# Altium PCB buck.PcbDoc
Units mm, origin at the board's own origin, x right, y up, seen from the top; angles counter-clockwise.
Board outline 50.25 x 42.93 mm, 2 copper layers (Top Layer, Bottom Layer); 22 components, 10 nets, 63 pads, 46 vias.
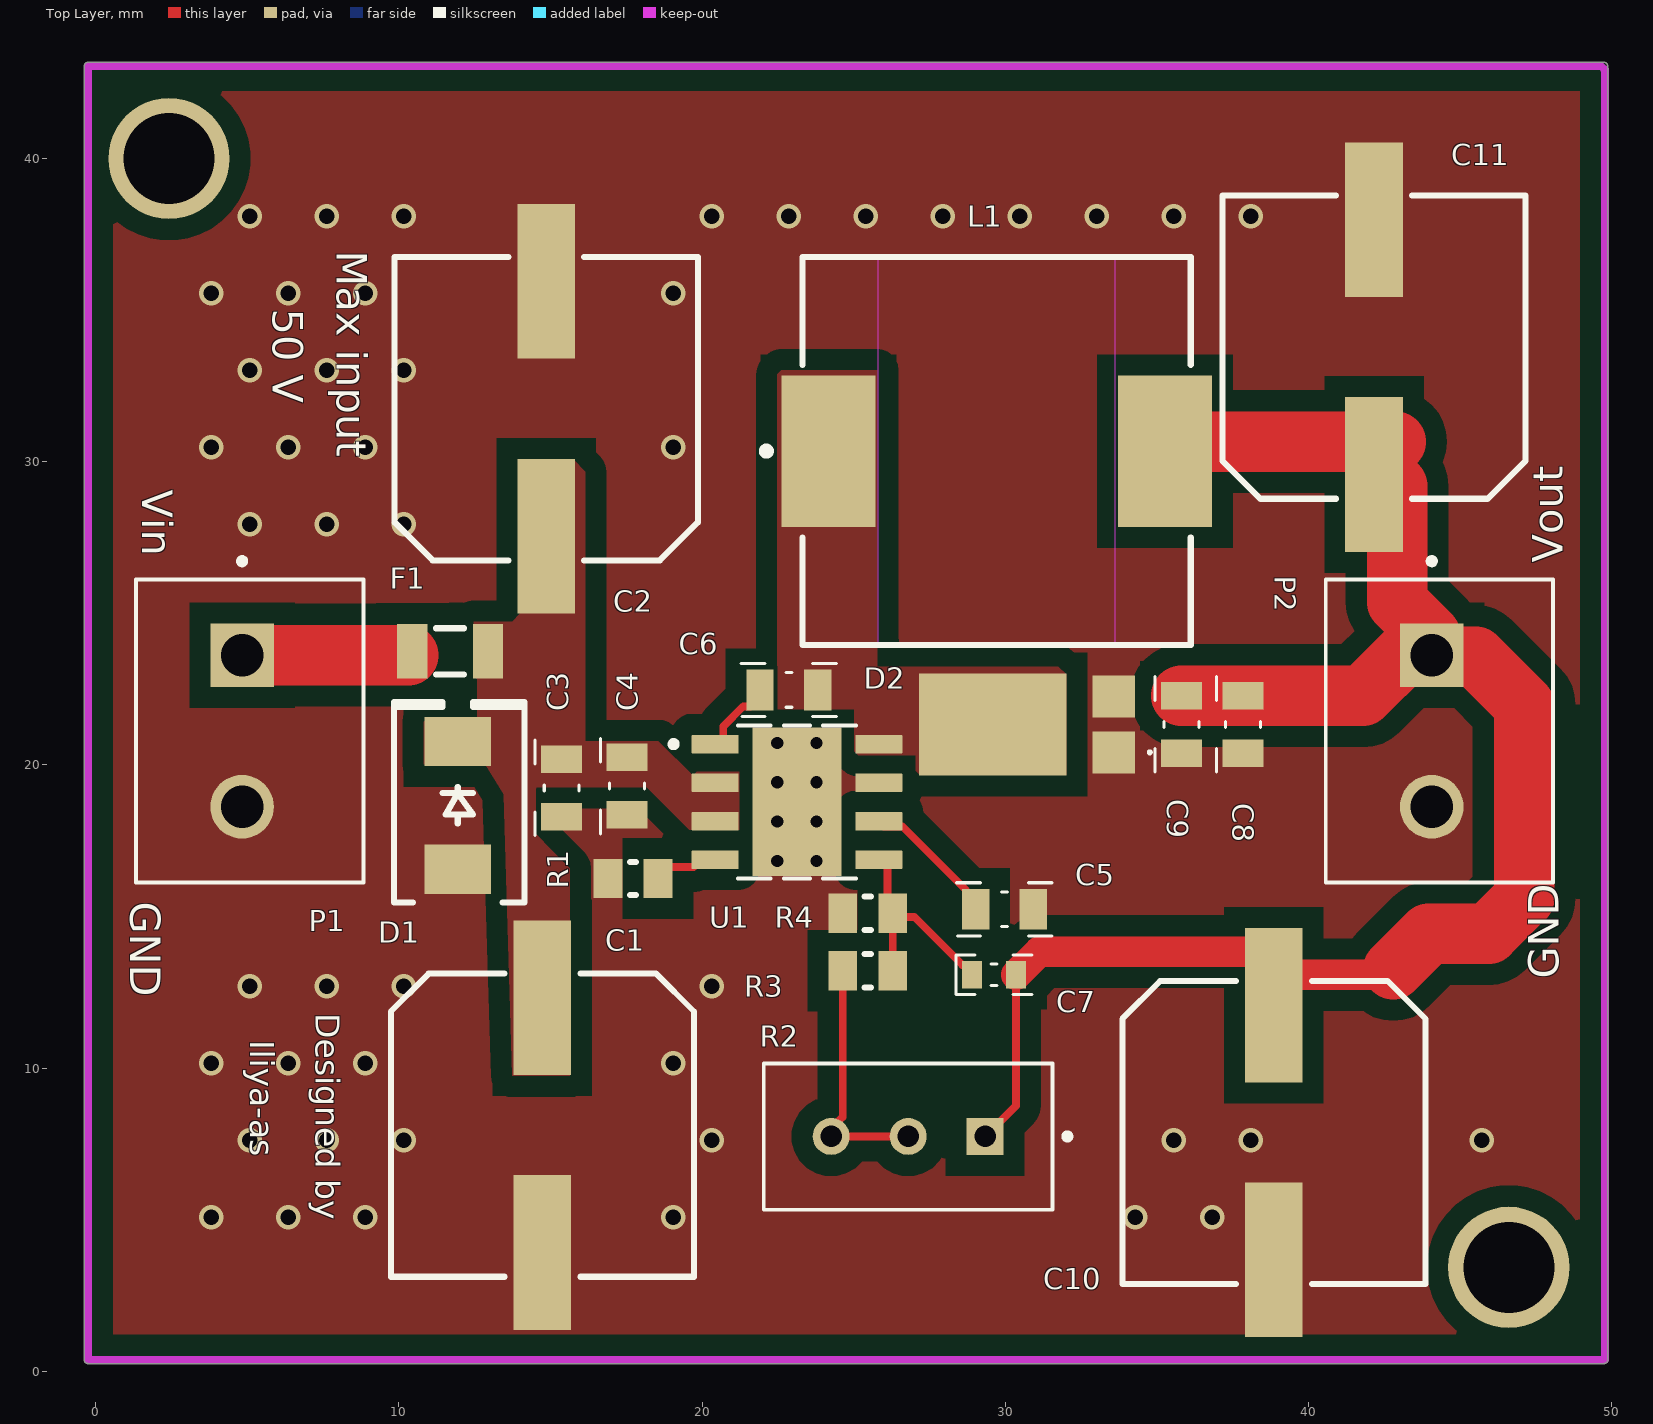
[diagram p0: Top Layer view]
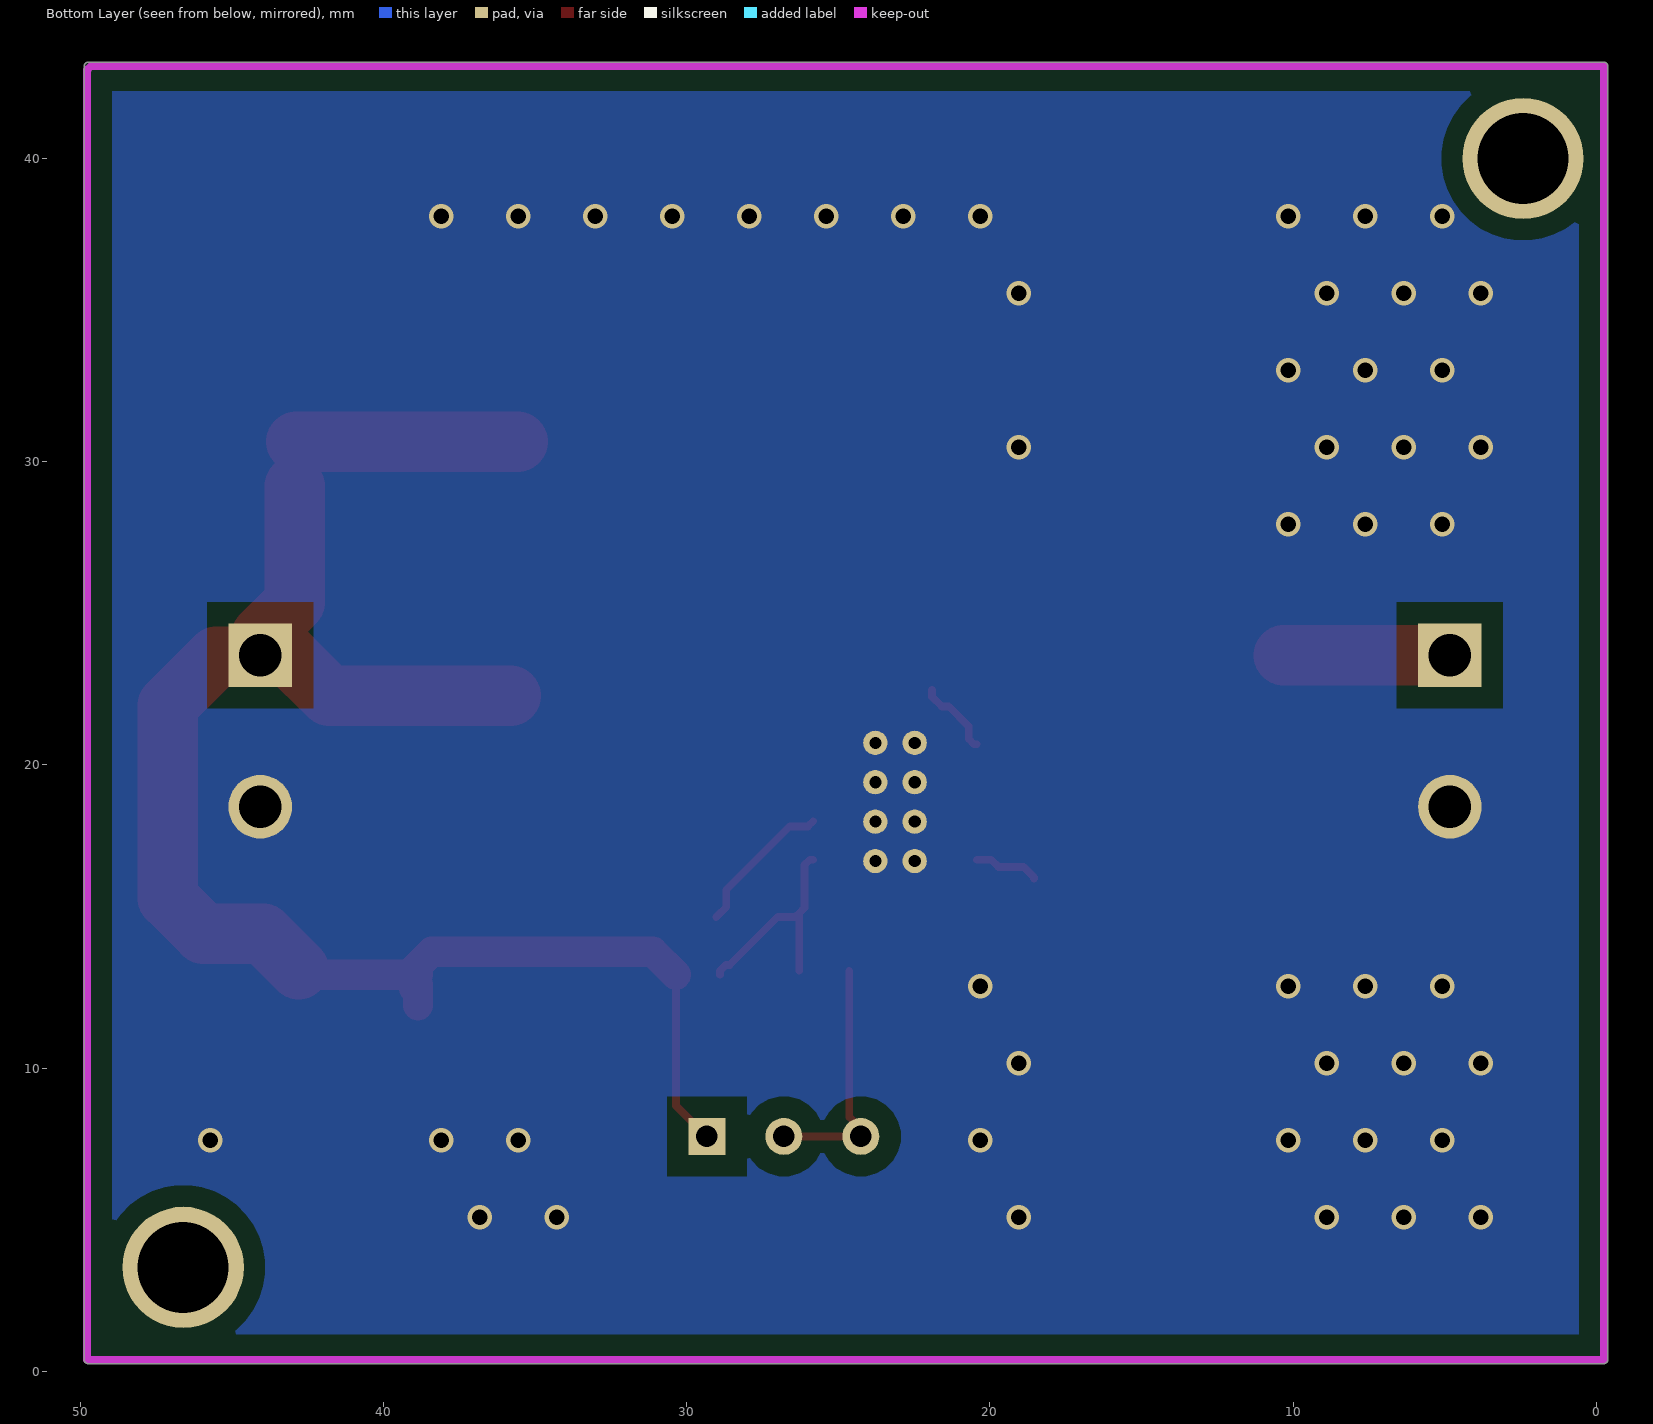
[diagram p1: Bottom Layer view, seen from below]

## Layer stack, top to bottom
Top Solder: solder mask 0.0102, Solder Resist, Dk 3.5
Top Layer: signal copper 0.0356
Dielectric 1: dielectric 0.32, FR-4, Dk 4.8
Bottom Layer: signal copper 0.0356
Bottom Solder: solder mask 0.0102, Solder Resist, Dk 3.5

## Board outline
-0.254,0.254 cw(c-0.254,0.381) -0.381,0.381 -0.381,43.053 cw(c-0.254,43.053) -0.254,43.18 49.746,43.18 cw(c49.746,43.053) 49.873,43.053 49.873,0.381 cw(c49.746,0.381) 49.746,0.254

## Design rules (kind name [scope] priority, off if disabled: settings)
BoardOutlineClearance [All] p1: gap=0.254 ignorepadtopadclearanceinfootprint=FALSE
Clearance "polygon global" [InNamedPolygon('GND_L01_P014') or      InNamedPolygon('GND_L02_P013')] p1: gap=0.7 ignorepadtopadclearanceinfootprint=FALSE
Clearance [All] p2: gap=0.127 ignorepadtopadclearanceinfootprint=TRUE
ComponentClearance [All] p1: gap=0 collisioncheckmode=3 verticalgap=0 showdistances=FALSE
HoleSize [All] p1: absolutevalues=TRUE maxlimit=3.5 minlimit=0.305 maxpercent=80.000 minpercent=20.000
HoleToHoleClearance [All] p1: gap=0.305 allowstackedmicrovias=TRUE
MinimumAnnularRing [All] p1: minimumring=0.105
PolygonConnect PolygonConnect_32 [All vs IsNamedPolygon('GND_L02_P013')] p1: connectstyle=Direct reliefconductorwidth=0.254 reliefentries=4 polygonreliefangle="90 Angle" airgapwidth=0.254
PolygonConnect PolygonConnect_31 [All vs IsNamedPolygon('SW_L01_P000')] p2: thpad.connectstyle=Direct thpad.reliefconductorwidth=0.254 thpad.reliefentries=4 thpad.polygonreliefangle="90 Angle" thpad.airgapwidth=0.254 smdpad.connectstyle=Direct smdpad.reliefconductorwidth=0.254 smdpad.reliefentries=4 smdpad.polygonreliefangle="90 Angle" smdpad.airgapwidth=0.254 via.connectstyle=Relief via.reliefconductorwidth=0.254 via.reliefentries=4 via.polygonreliefangle="90 Angle" via.airgapwidth=0.254
PolygonConnect PolygonConnect_30 [All vs IsNamedPolygon('GND_L01_P014')] p3: connectstyle=Direct reliefconductorwidth=0.254 reliefentries=4 polygonreliefangle="90 Angle" airgapwidth=0.254
PolygonConnect PolygonConnect_29 [All vs IsNamedPolygon('DC-IN_L01_P008')] p4: thpad.connectstyle=Direct thpad.reliefconductorwidth=0.254 thpad.reliefentries=4 thpad.polygonreliefangle="90 Angle" thpad.airgapwidth=0.254 smdpad.connectstyle=Direct smdpad.reliefconductorwidth=0.254 smdpad.reliefentries=4 smdpad.polygonreliefangle="90 Angle" smdpad.airgapwidth=0.254 via.connectstyle=Relief via.reliefconductorwidth=0.254 via.reliefentries=4 via.polygonreliefangle="90 Angle" via.airgapwidth=0.254
PolygonConnect PolygonConnect_28 [All vs IsNamedPolygon('DC-IN_L01_P004')] p5: connectstyle=Direct reliefconductorwidth=0.254 reliefentries=4 polygonreliefangle="90 Angle" airgapwidth=0.254
PolygonConnect PolygonConnect_27 [All vs IsNamedPolygon('GND_L02_P011')] p6: connectstyle=Direct reliefconductorwidth=0.254 reliefentries=4 polygonreliefangle="90 Angle" airgapwidth=0.254
PolygonConnect PolygonConnect_26 [All vs IsNamedPolygon('SW_L01_P000')] p7: connectstyle=Direct reliefconductorwidth=0.254 reliefentries=4 polygonreliefangle="90 Angle" airgapwidth=0.254
PolygonConnect PolygonConnect_25 [All vs IsNamedPolygon('GND_L01_P012')] p8: thpad.connectstyle=Direct thpad.reliefconductorwidth=0.254 thpad.reliefentries=4 thpad.polygonreliefangle="90 Angle" thpad.airgapwidth=0.254 smdpad.connectstyle=Direct smdpad.reliefconductorwidth=0.254 smdpad.reliefentries=4 smdpad.polygonreliefangle="90 Angle" smdpad.airgapwidth=0.254 via.connectstyle=Relief via.reliefconductorwidth=0.254 via.reliefentries=4 via.polygonreliefangle="90 Angle" via.airgapwidth=0.254
PolygonConnect PolygonConnect_24 [All vs IsNamedPolygon('DC-IN_L01_P008')] p9: thpad.connectstyle=Direct thpad.reliefconductorwidth=0.254 thpad.reliefentries=4 thpad.polygonreliefangle="90 Angle" thpad.airgapwidth=0.254 smdpad.connectstyle=Direct smdpad.reliefconductorwidth=0.254 smdpad.reliefentries=4 smdpad.polygonreliefangle="90 Angle" smdpad.airgapwidth=0.254 via.connectstyle=Relief via.reliefconductorwidth=0.254 via.reliefentries=4 via.polygonreliefangle="90 Angle" via.airgapwidth=0.254
PolygonConnect PolygonConnect_23 [All vs IsNamedPolygon('DC-IN_L01_P004')] p10: thpad.connectstyle=Direct thpad.reliefconductorwidth=0.254 thpad.reliefentries=4 thpad.polygonreliefangle="90 Angle" thpad.airgapwidth=0.254 smdpad.connectstyle=Direct smdpad.reliefconductorwidth=0.254 smdpad.reliefentries=4 smdpad.polygonreliefangle="90 Angle" smdpad.airgapwidth=0.254 via.connectstyle=Relief via.reliefconductorwidth=0.254 via.reliefentries=4 via.polygonreliefangle="90 Angle" via.airgapwidth=0.254
PolygonConnect PolygonConnect_22 [All vs IsNamedPolygon('GND_L01_P010')] p11: thpad.connectstyle=Direct thpad.reliefconductorwidth=0.254 thpad.reliefentries=4 thpad.polygonreliefangle="90 Angle" thpad.airgapwidth=0.254 smdpad.connectstyle=Direct smdpad.reliefconductorwidth=0.254 smdpad.reliefentries=4 smdpad.polygonreliefangle="90 Angle" smdpad.airgapwidth=0.254 via.connectstyle=Relief via.reliefconductorwidth=0.254 via.reliefentries=4 via.polygonreliefangle="90 Angle" via.airgapwidth=0.254
PolygonConnect PolygonConnect_21 [All vs IsNamedPolygon('GND_L02_P009')] p12: connectstyle=Direct reliefconductorwidth=0.254 reliefentries=4 polygonreliefangle="90 Angle" airgapwidth=0.254
PolygonConnect PolygonConnect_20 [All vs IsNamedPolygon('GND_L02_P009')] p13: thpad.connectstyle=Direct thpad.reliefconductorwidth=0.254 thpad.reliefentries=4 thpad.polygonreliefangle="90 Angle" thpad.airgapwidth=0.254 smdpad.connectstyle=Direct smdpad.reliefconductorwidth=0.254 smdpad.reliefentries=4 smdpad.polygonreliefangle="90 Angle" smdpad.airgapwidth=0.254 via.connectstyle=Relief via.reliefconductorwidth=0.254 via.reliefentries=4 via.polygonreliefangle="90 Angle" via.airgapwidth=0.254
PolygonConnect PolygonConnect_19 [All vs IsNamedPolygon('GND_L02_P009')] p14: connectstyle=Direct reliefconductorwidth=0.254 reliefentries=4 polygonreliefangle="90 Angle" airgapwidth=0.254
PolygonConnect PolygonConnect_18 [All vs IsNamedPolygon('GND_L02_P009')] p15: connectstyle=Direct reliefconductorwidth=0.254 reliefentries=4 polygonreliefangle="90 Angle" airgapwidth=0.254
PolygonConnect PolygonConnect_17 [All vs IsNamedPolygon('DC-IN_L01_P008')] p16: connectstyle=Direct reliefconductorwidth=0.254 reliefentries=4 polygonreliefangle="90 Angle" airgapwidth=0.254
PolygonConnect PolygonConnect_16 [All vs IsNamedPolygon('GND_L02_P006')] p17: connectstyle=Direct reliefconductorwidth=0.254 reliefentries=4 polygonreliefangle="90 Angle" airgapwidth=0.254
PolygonConnect PolygonConnect_15 [All vs IsNamedPolygon('GND_L01_P005')] p18: connectstyle=Direct reliefconductorwidth=0.254 reliefentries=4 polygonreliefangle="90 Angle" airgapwidth=0.254
PolygonConnect PolygonConnect_14 [All vs IsNamedPolygon('DC-IN_L01_P004')] p19: connectstyle=Direct reliefconductorwidth=0.254 reliefentries=4 polygonreliefangle="90 Angle" airgapwidth=0.254
PolygonConnect PolygonConnect_13 [All vs IsNamedPolygon('DC-IN_L01_P002')] p20: connectstyle=Direct reliefconductorwidth=0.254 reliefentries=4 polygonreliefangle="90 Angle" airgapwidth=0.254
PolygonConnect PolygonConnect_12 [All vs IsNamedPolygon('SW_L01_P000')] p21: connectstyle=Direct reliefconductorwidth=0.254 reliefentries=4 polygonreliefangle="90 Angle" airgapwidth=0.254
PolygonConnect PolygonConnect_11 [All vs IsNamedPolygon('SW_L01_P000')] p22: connectstyle=Direct reliefconductorwidth=0.254 reliefentries=4 polygonreliefangle="90 Angle" airgapwidth=0.254
PolygonConnect PolygonConnect_10 [All vs IsNamedPolygon('SW_L01_P000')] p23: connectstyle=Direct reliefconductorwidth=0.254 reliefentries=4 polygonreliefangle="90 Angle" airgapwidth=0.254
PolygonConnect PolygonConnect_9 [All vs IsNamedPolygon('SW_L01_P002')] p24: connectstyle=Direct reliefconductorwidth=0.254 reliefentries=4 polygonreliefangle="90 Angle" airgapwidth=0.254
PolygonConnect PolygonConnect_8 [All vs IsNamedPolygon('SW_L01_P000')] p25: connectstyle=Direct reliefconductorwidth=0.254 reliefentries=4 polygonreliefangle="90 Angle" airgapwidth=0.254
PolygonConnect PolygonConnect_7 [All vs IsNamedPolygon('GND_L01_P000')] p26: connectstyle=Direct reliefconductorwidth=0.254 reliefentries=4 polygonreliefangle="90 Angle" airgapwidth=0.254
PolygonConnect PolygonConnect_6 [All vs IsNamedPolygon('GND_L02_P008')] p27: connectstyle=Direct reliefconductorwidth=0.254 reliefentries=4 polygonreliefangle="90 Angle" airgapwidth=0.254
PolygonConnect PolygonConnect_5 [All vs IsNamedPolygon('SW_L01_P005')] p28: thpad.connectstyle=Direct thpad.reliefconductorwidth=0.254 thpad.reliefentries=4 thpad.polygonreliefangle="90 Angle" thpad.airgapwidth=0.254 smdpad.connectstyle=Direct smdpad.reliefconductorwidth=0.254 smdpad.reliefentries=4 smdpad.polygonreliefangle="90 Angle" smdpad.airgapwidth=0.254 via.connectstyle=Relief via.reliefconductorwidth=0.254 via.reliefentries=4 via.polygonreliefangle="90 Angle" via.airgapwidth=0.254
PolygonConnect PolygonConnect_4 [All vs IsNamedPolygon('GND_L01_P009')] p29: connectstyle=Direct reliefconductorwidth=0.254 reliefentries=4 polygonreliefangle="90 Angle" airgapwidth=0.254
PolygonConnect PolygonConnect_3 [All vs IsNamedPolygon('DC-IN_L01_P004')] p30: connectstyle=Direct reliefconductorwidth=0.254 reliefentries=4 polygonreliefangle="90 Angle" airgapwidth=0.254
PolygonConnect PolygonConnect_2 [All vs IsNamedPolygon('GND_L02_P000')] p31: connectstyle=Direct reliefconductorwidth=0.254 reliefentries=4 polygonreliefangle="90 Angle" airgapwidth=0.254
PolygonConnect PolygonConnect_1 [All vs IsNamedPolygon('GND_L01_P001')] p32: connectstyle=Direct reliefconductorwidth=0.254 reliefentries=4 polygonreliefangle="90 Angle" airgapwidth=0.254
PolygonConnect "vias Direct" [IsVia and InNet('GND')] p33: connectstyle=Direct reliefconductorwidth=0.254 reliefentries=4 polygonreliefangle="90 Angle" airgapwidth=0.254
PolygonConnect [All] p34: thpad.connectstyle=Relief thpad.reliefconductorwidth=0.356 thpad.reliefentries=4 thpad.polygonreliefangle="45 Angle" thpad.airgapwidth=0.254 smdpad.connectstyle=Relief smdpad.reliefconductorwidth=0.356 smdpad.reliefentries=4 smdpad.polygonreliefangle="45 Angle" smdpad.airgapwidth=0.254 via.connectstyle=Direct via.reliefconductorwidth=0.356 via.reliefentries=4 via.polygonreliefangle="45 Angle" via.airgapwidth=0.254
RoutingVias [All] p1: holewidth=0.508 width=0.508 viastyle="Through Hole" minholewidth=0.508 minwidth=0.508 maxholewidth=0.508 maxwidth=0.8
SilkToSilkClearance [All] p1: silktosilkclearance=0.203
SilkToSolderMaskClearance [IsPad] p1: minsilkscreentomaskgap=0.15 clearancetoexposedcopper=TRUE
SolderMaskExpansion Viastended [IsVia] p1: expansion=0.102 istentingtop=FALSE
SolderMaskExpansion [All] p2: expansion=0.09 istentingtop=FALSE
SupplyNets "Schematic Supply Nets_3" [InNet('Input')] p1: voltage=0.000
SupplyNets "Schematic Supply Nets_2" [InNet('OUT')] p2: voltage=0.000
SupplyNets "Schematic Supply Nets_1" [InNet('DC-IN')] p3: voltage=0.000
SupplyNets "Schematic Supply Nets_4" [InNet('GND')] p4: voltage=0.000
Width [All] p1: maxlimit=100 minlimit=0.127 preferedwidth=0.254
25 further rules are at their usual default settings.

## Components (designator, comment, footprint, x,y, rotation, side; value= is the part's Value field where it differs from the comment)
C1 "100uF" CAPACITOR-10mm 14.732,8.119 r270 top
C2 "100uF" CAPACITOR-10mm 14.859,31.75 r90 top
C3 "2.2uF" CAPACITOR-0805 15.367,19.243 r90 top
C4 "2.2uF" CAPACITOR-0805 17.526,19.304 r90 top
C5 "100nF" CAPACITOR-0805 29.972,15.24 r0 top
C6 "100nF" CAPACITOR-0805 22.86,22.479 r0 top
C7 "470pF" CAPACITOR-0603 29.628,13.081 r0 top
C8 "2.2uF" CAPACITOR-0805 37.846,21.336 r90 top
C9 "2.2uF" CAPACITOR-0805 35.814,21.336 r90 top
C10 "47uF" CAPACITOR-10mm 38.862,7.874 r270 top
C11 "47uF" CAPACITOR-10mm 42.164,33.782 r90 top
D1 "TVS Diode" "SMB DIODE" 11.938,18.669 r90 top
D2 "PDS5100Q-13D" PDS5100Q13D 30.717,21.336 r180 top
F1 "3A" FUSE-1206 11.684,23.749 r0 top
L1 "22uH" "Power Inductor" 29.718,30.353 r0 top
P1 "DC-Input" "2 Pin Terminal Block 5mm Pitch" 4.826,21.122 r270 top
P2 "Output" "2 Pin Terminal Block 5mm Pitch" 44.069,21.122 r270 top
R1 "47K" Resistor-0805 420.668,-103.765 r0 top
R2 "500K" "Multi turn" 26.797,7.747 r180 top
R3 "100K" Resistor-0805 -377.487,133.229 r180 top
R4 "10K" Resistor-0805 428.415,-104.908 r0 top
U1 "LMR16030" LMR16030 23.129,18.781 r0 top

## Footprints (in the part's own frame and the unit in brackets; to place one, negate y for a bottom-side part, rotate by r counter-clockwise, add the part's x,y. Pads: shape width x height; smd on the part's side, far side on the other; paste and mask are expansions set on the pad)
"2 Pin Terminal Block 5mm Pitch" [mm]
  rect 2.1x2.1 / inner round 2.1 / far side rect 2.1x2.1 hole 1.4: 1(-2.5,0)
  round 2.1 hole 1.4: 2(2.5,0)
  silkscreen extent -5.7,-3.5 5,4, body extent -5.6,-3.75 5,3.75, height 10
CAPACITOR-10mm [mm] "Aluminum SMT Polymer Capacitor, 10.0mm Diameter, 10.80mm Height, 11.00mm Maximum Leads Span"
  rect 5.1x1.9 smd: 1(-4.2,0) 2(4.2,0)
  silkscreen extent -5,-5 5,5, body extent -5.5,-5 5.5,5, height 10.8
CAPACITOR-0603 [mm]
  rect 0.65x0.9 smd: 1(-0.725,0) 2(0.725,0)
  silkscreen extent -1.25,-0.65 1.25,0.65, body extent -0.82,-0.43 0.82,0.43, height 0.4
CAPACITOR-0805 [mm]
  rect 0.9x1.35 smd: 1(-0.95,0) 2(0.95,0)
  silkscreen extent -1.58,-0.58 1.58,0.87, body extent -1.02,-0.65 1.02,0.65, height 0.5
FUSE-1206 [mm]
  rect 1x1.8 smd: 1(-1.25,0) 2(1.25,0)
  silkscreen extent -0.46,-0.76 0.46,0.76, body extent -1.59,-0.76 1.59,0.76, height 0.66
LMR16030 [mm]
  rrect5% 1.55x0.6 smd mask+0: 1(-2.7,1.905) 2(-2.7,0.635) 3(-2.7,-0.635) 4(-2.7,-1.905) 5(2.7,-1.905) 6(2.7,-0.635) 7(2.7,0.635) 8(2.7,1.905)
  rect 2.95x4.9 smd paste-3 mask+0: 9(0,0)
  round 0.8 hole 0.4: 10(-0.65,1.95) 11(0.65,1.95) 12(-0.65,0.65) 13(0.65,0.65) 14(-0.65,-0.65) 15(0.65,-0.65) 16(-0.65,-1.95) 17(0.65,-1.95)
  silkscreen extent -4.17,-2.52 1.95,2.52, body extent -3,-2.45 3,2.45, height 1.7
"Multi turn" [mm]
  rect 1.218x1.218 / inner round 1.218 / far side rect 1.218x1.218 hole 0.71: 1(-2.54,0)
  round 1.218 hole 0.71: 2(0,0) 3(2.54,0)
  silkscreen extent -5.35,-2.41 4.76,2.42, body extent -4.76,-2.41 4.76,2.42, height 11.55
PDS5100Q13D [mm]
  rect 1.4x1.39 smd: 1(-2.856,0.92) 2(-2.856,-0.92)
  rect 4.86x3.36 smd: 3(1.126,0)
  silkscreen extent -4.1,0.87 -4,0.97, body extent -3.29,-1.98 3.35,1.98, height 1.25
"Power Inductor" [mm] "SMT Power Inductor, 2-Leads, body 12.5x12.5mm"
  rect 3.1x5 smd: 1(-5.55,0) 2(5.55,0)
  Top Layer keep-out region: -3.9,6.4 3.9,6.4 3.9,-6.4 -3.9,-6.4
  silkscreen extent -7.72,-6.4 6.4,6.4, body extent -6.75,-6.25 6.75,6.25, height 6.2
Resistor-0805 [mm]
  rect 0.95x1.3 smd: 1(-403.776,120.021) 2(-402.126,120.021)
  silkscreen extent -403.05,119.47 -402.85,120.57, body extent -403.97,119.39 -401.94,120.66, height 0.6
"SMB DIODE" [mm]
  rect 1.62x2.18 smd: A(-2.11,0) C(2.11,0)
  silkscreen extent -3.2,-2.2 3.4,2.1, body extent -2.6,-1.8 2.6,1.8, height 2.4

## Part data
C1 C2: library part "Capacitor Electrolytic", "100uF-63V"
C3 C4 C8 C9: library part Capacitor, "2.2uF-100V-0805-X7R"
C5 C6: library part Capacitor, "100nF-100V-0805-X7R"
C7: library part Capacitor, "470pF-100V-0603-C0G"
C10 C11: library part "Capacitor Electrolytic", "47uF-80V"
D1: library part Diode, "SMB-J51A"
D2: library part "Schottky Diode"
F1: library part Fuse, "PTC Fuse- 3A- 1206"
L1: library part "Power Inductor", "22uH-TMPC1265HP-220MG-D"
P1 P2: library part "Header 2 pin", "KF301-5.0-2pin"
R1: library part Resistor, "Resisto47K-0805"
R2: library part "Multi Turn", "500K multi turn"
R3: library part Resistor, "Resistor 100K-0805"
R4: library part Resistor, "Resistor 10K-0805"
U1: "LMR16030-Switching Regulator"

## Free pads (board coordinates)
  round 4 hole 3: 1(2.413,40.005) 1(46.609,3.429)

## Via types
v1: diameter 0.8, hole 0.508, Top Layer to Bottom Layer, tented both sides, 46 vias

## Nets (pads, with @x,y where several pads share a name; then routed paths per layer and width w, separated by ;. In a path a pad name is that pad's centre, name@x,y a point inside that pad or via, vN(x,y) a via of type N, cw(c..) or ccw(c..) an arc to the next point about the centre after c; other vN are vias at no path point)
DC-IN: C1.1 C2.1 C3.2 C4.2 D1.C F1.2 U1.2 U1.3
FB: C7.1 R3.1 R4.2 U1.5 | length 7.5
  Top Layer w0.254: U1.5 25.943,16.876 26.116,16.703 26.116,15.286 R4.2 ; R3.1 26.289,14.938 R4.2 ; C7.1 28.903,13.206 28.705,13.404 28.58,13.404 26.996,14.988 26.414,14.988 R4.2
GND: C1.2 C2.2 C3.1 C4.1 C5.2 C8.1 C9.1 C10.2 C11.2 D1.A D2.1 D2.2 P1.2 P2.2 R1.1 R4.1 U1.7 U1.9 U1.10 U1.11 U1.12 U1.13 U1.14 U1.15 U1.16 U1.17
  other v1: 3.81,5.08 6.35,5.08 8.89,5.08 19.05,5.08 34.29,5.08 36.83,5.08 5.08,7.62 7.62,7.62 10.16,7.62 20.32,7.62 35.56,7.62 38.1,7.62 45.72,7.62 3.81,10.16 6.35,10.16 8.89,10.16 19.05,10.16 5.08,12.7 7.62,12.7 10.16,12.7 20.32,12.7 5.08,27.94 7.62,27.94 10.16,27.94 3.81,30.48 6.35,30.48 8.89,30.48 19.05,30.48 5.08,33.02 7.62,33.02 10.16,33.02 3.81,35.56 6.35,35.56 8.89,35.56 19.05,35.56 5.08,38.1 7.62,38.1 10.16,38.1 20.32,38.1 22.86,38.1 25.4,38.1 27.94,38.1 30.48,38.1 33.02,38.1 35.56,38.1 38.1,38.1
Input: F1.1 P1.1 | length 5.5
  Top Layer w2: P1.1 F1.1@10.307,23.622
NetC6_1: C6.1 U1.1 | length 2.6
  Top Layer w0.254: U1.1 20.528,20.686 20.701,20.859 20.701,21.27 21.362,21.931 21.587,21.931 21.91,22.254 C6.1
NetR2_2: R2.2 R2.3 R3.2 | length 8.2
  Top Layer w0.254: R3.2 24.639,8.39 24.257,8.008 R2.3 R2.2
OUT: C7.2 C8.2 C9.2 C10.1 C11.1 L1.2 P2.1 R2.1 | length 57.4
  Top Layer w0.254: R2.1 30.353,8.763 C7.2
  Top Layer w1: C7.2 31.115,13.843 38.412,13.843 38.989,13.266 C10.1@38.989,13.081 ; C10.1 C10.1@38.862,12.758 ; C10.1@38.862,13.081 C10.1@38.989,13.081 ; C10.1@38.989,12.631 C10.1@38.989,13.081 ; 42.554,13.081 C10.1@38.989,13.081
  Top Layer w2: L1.2@35.581,30.666 C11.1@42.876,30.666 ; C9.2 C8.2 41.797,22.286 P2.1@43.18,23.669 ; 42.799,13.264 43.971,14.436 45.945,14.436 47.117,15.608 47.117,21.971 45.516,23.572 P2.1@44.116,23.572 ; C11.1@42.926,29.201 42.926,25.371 44.019,24.278 44.019,23.672 P2.1 ; P2.1@43.23,23.619 P2.1@44.069,23.619
RT: R1.2 U1.4 | length 2.2
  Top Layer w0.254: R1.2 18.542,16.289 18.89,16.637 19.715,16.637 19.954,16.876 U1.4
SS: C5.1 U1.6 | length 4.8
  Top Layer w0.254: U1.6 26.002,17.973 26.604,17.973 28.699,15.878 28.699,15.309 C5.1@29.022,14.986
SW: C6.2 D2.3 L1.1 U1.8

## Polygon pours and split planes (outlines as drawn)
GND on Top Layer "GND_L01_P014" (solid, remove dead copper, pour order 14): 0,42.672 49.53,42.672 49.276,42.418 49.276,0.635 0.127,0.635 0,0.762
DC-IN on Top Layer "DC-IN_L01_P004" (solid, remove dead copper, pour order 4): 21.226,17.869 21.226,19.774 19.829,19.774 19.702,19.647 18.559,20.79 16.146,20.79 16.146,29.68 15.765,30.061 13.987,30.061 13.987,24.981 13.733,24.727 12.463,24.727 12.463,22.949 12.59,22.822 12.59,21.552 10.939,21.552 10.812,21.425 10.812,20.028 12.844,20.028 13.451,19.039 13.733,9.741 15.638,9.741 15.638,16.599 13.911,18.326 14.537,19.266 18.178,19.266 19.575,17.869
SW on Top Layer "SW_L01_P000" (solid, remove dead copper, pour order 0): 32.004,19.685 27.178,19.685 27.051,19.812 27.051,20.32 25.146,20.32 25.019,20.447 25.019,21.844 22.479,21.844 22.479,23.368 22.479,27.855 22.479,32.893 22.606,33.02 25.781,33.02 25.781,23.99 25.818,23.953 25.781,23.916 25.781,23.241 31.75,23.241 32.004,22.987
DC-IN on Top Layer "DC-IN_L01_P008" (solid, remove dead copper, pour order 8): 14.508,19.236 14.508,17.556 14.478,17.526 15.405,16.599 15.638,16.599 15.638,9.741 13.733,9.741 13.733,19.139 12.844,20.028
GND on Bottom Layer "GND_L02_P013" (solid, remove dead copper, pour order 13): -0.127,42.799 0.127,43.053 49.657,43.053 49.657,0.381 -0.127,0.381

## Keep-outs
Keep-Out Layer:
  lines w0.254: -0.254,0.381 49.784,0.381 49.784,42.926 49.657,43.053 49.276,43.053 -0.254,43.053 -0.254,0.381

## Silkscreen, mask and mechanical layers (free items; w line width, h text height)
Top Overlay:
  text "Max input" at 7.953,36.957 h1 r270
  text "50 V" at 5.842,35.052 h1 r270
  text "Vin" at 1.524,29.083 h1 r270
  text "Vout" at 48.387,26.67 h1 r90
  text "GND" at 1.143,15.494 h1 r270
  text "GND" at 48.26,12.954 h1 r90
  text "Designed by" at 7.252,11.811 h0.8 r270
  text "Iliya-as" at 5.093,10.922 h0.8 r270